# Altium PCB PCB3.PcbDoc
Units mil, origin at the board's own origin, x right, y up, seen from the top; angles counter-clockwise.
Board outline 3155 x 3150 mil, 2 copper layers (Top Layer, Bottom Layer); 10 components, 8 nets, 25 pads, 0 vias.
Unrouted connection lines stored in the file: 3.
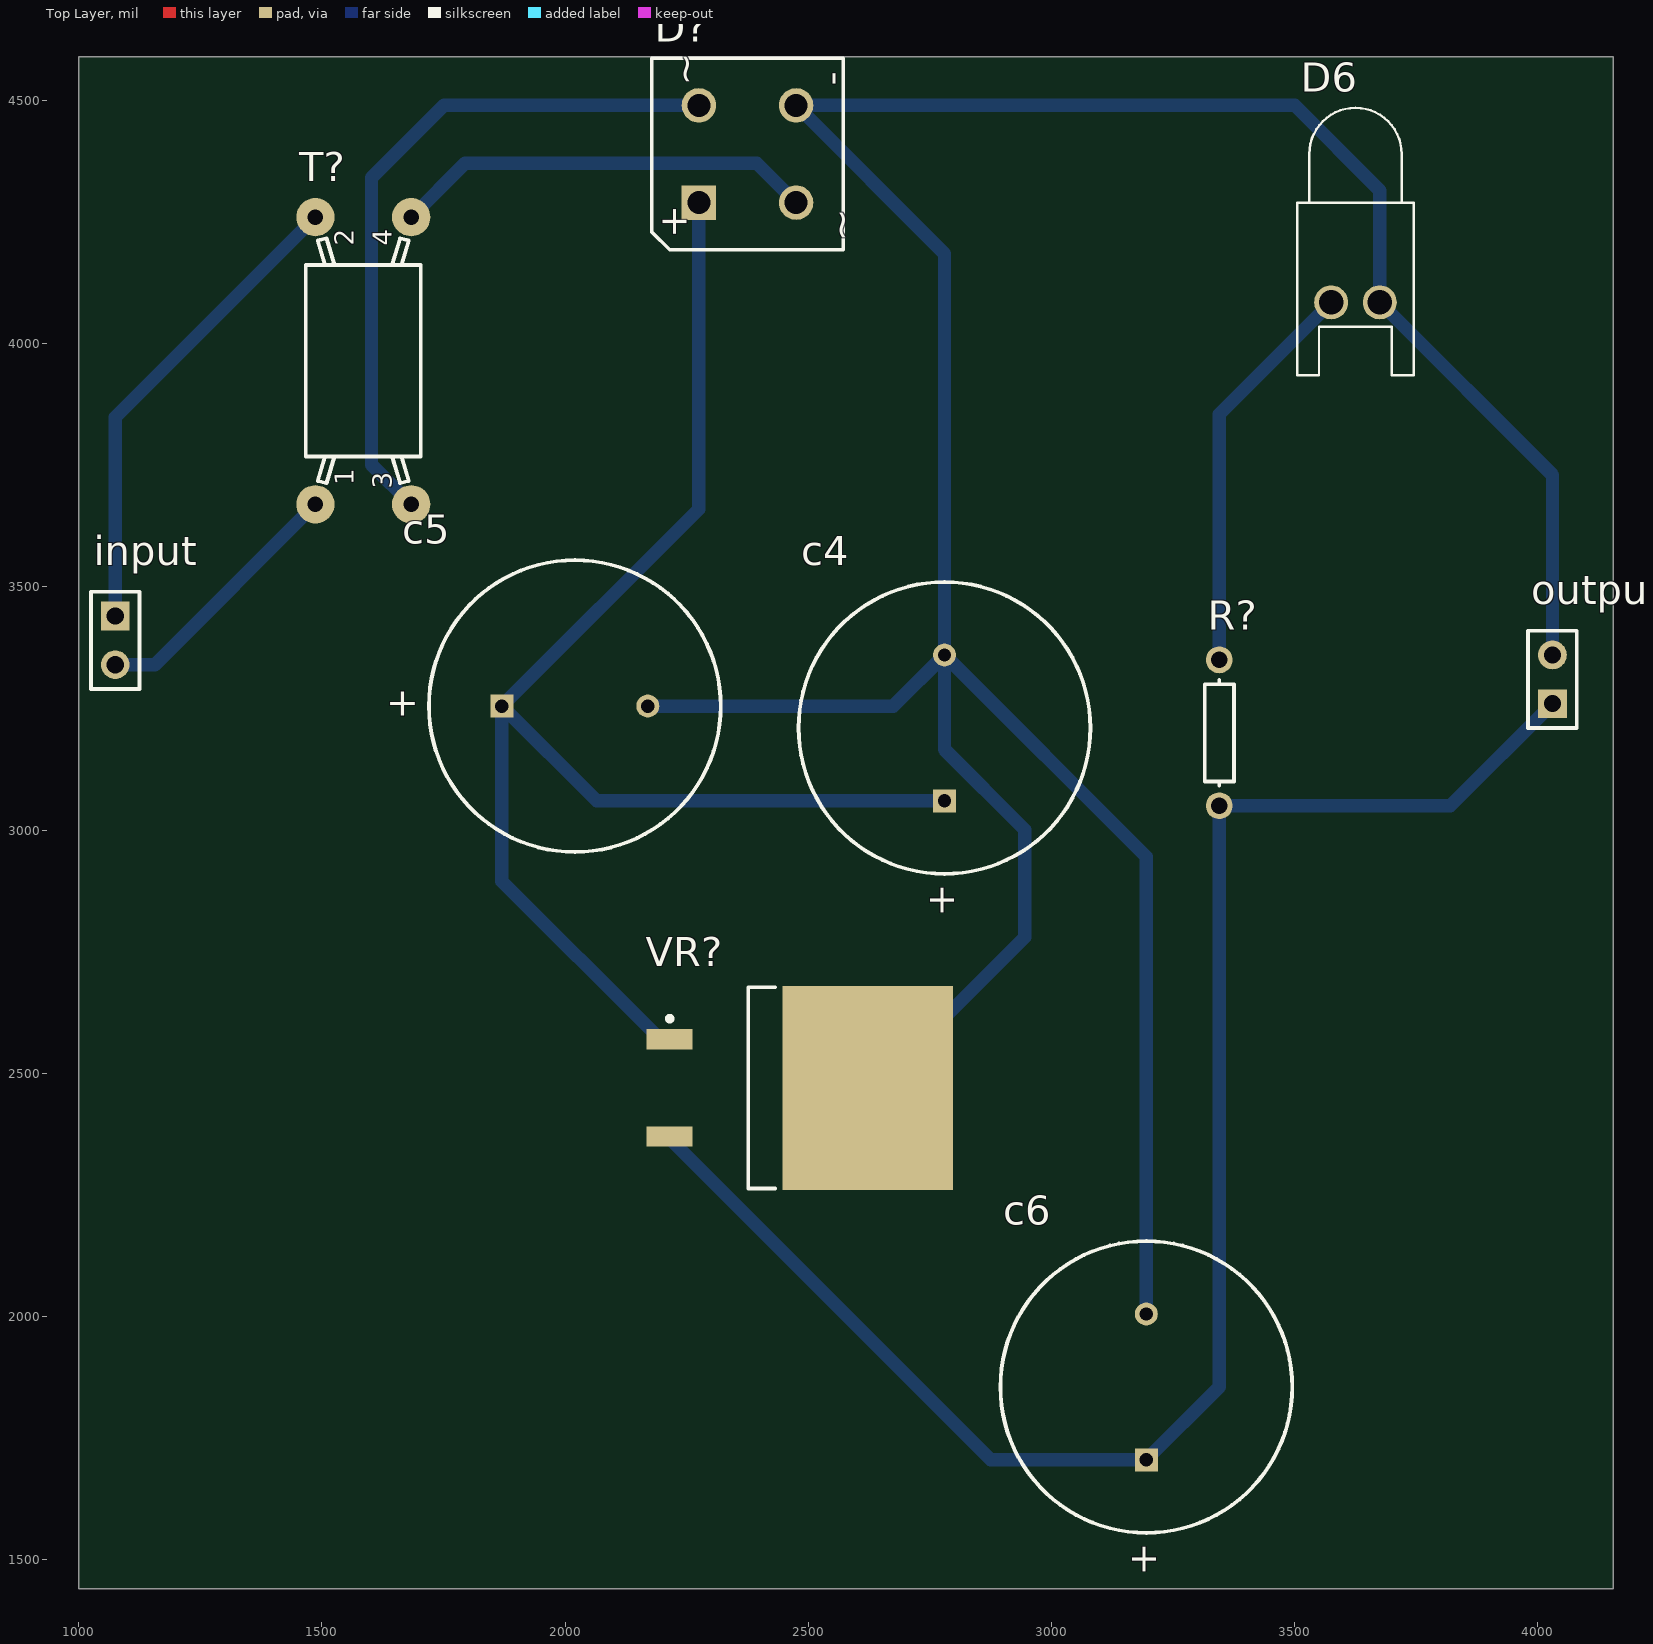
[diagram p0: Top Layer view]
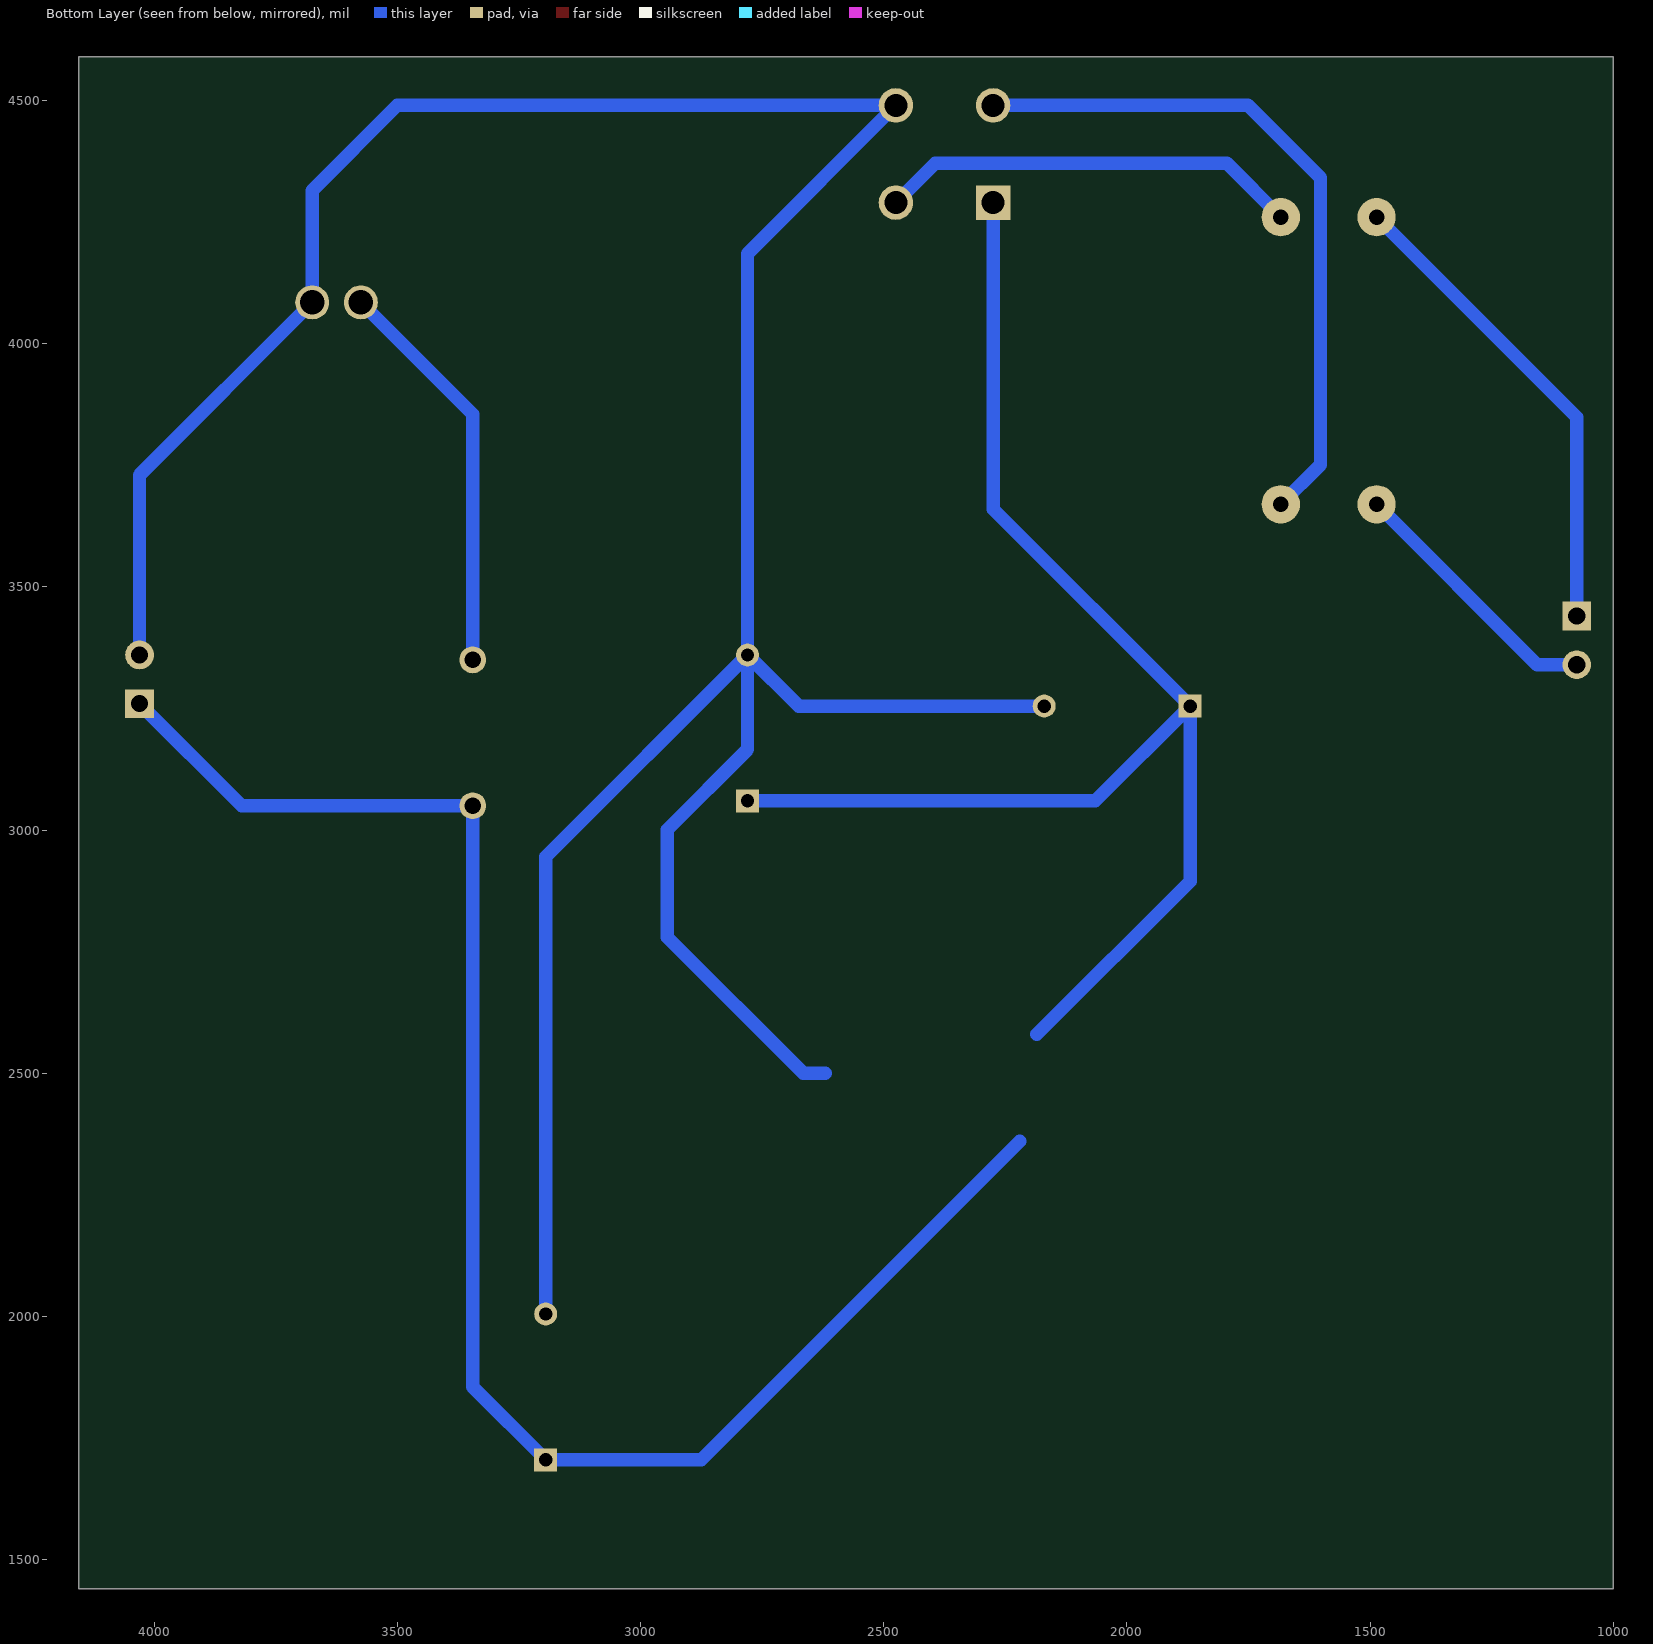
[diagram p1: Bottom Layer view, seen from below]

## Layer stack, top to bottom
Top Solder: solder mask 0.4, Solder Resist, Dk 3.5
Top Layer: signal copper 1.4
Dielectric 1: dielectric 12.6, FR-4, Dk 4.8
Bottom Layer: signal copper 1.4
Bottom Solder: solder mask 0.4, Solder Resist, Dk 3.5

## Board outline
1000,1440 4155,1440 4155,4590 1000,4590

## Design rules (kind name [scope] priority, off if disabled: settings)
Clearance [All] p1: gap=27.56 ignorepadtopadclearanceinfootprint=FALSE
PlaneConnect [All] p1: planeconnectstyle=Direct reliefexpansion=20 reliefentries=4 reliefconductorwidth=10 reliefairgap=10
PolygonConnect [All] p1: connectstyle=Relief reliefconductorwidth=10 reliefentries=4 polygonreliefangle="90 Angle" airgapwidth=10
RoutingLayers [All] p1: top layer_v5=FALSE bottom layer_v5=TRUE
RoutingVias [All] p1: holewidth=28 width=50 viastyle="Through Hole" minholewidth=28 minwidth=50 maxholewidth=28 maxwidth=50
SolderMaskExpansion [All] p1: expansion=4 istentingtop=FALSE
Width [All] p1: maxlimit=27.56 minlimit=27.56 preferedwidth=27.56
28 further rules are at their usual default settings.

## Components (designator, comment, footprint, x,y, rotation, side; value= is the part's Value field where it differs from the comment)
c4 "Cap Pol1" RB7.6-15 2780,3210 r270 top value=100pF
c5 "Cap Pol1" RB7.6-15 2020,3255 r180 top value=100pF
c6 "Cap Pol1" RB7.6-15 3195,1855 r270 top value=100pF
D6 "LED0" LED-0 3625,4085 r180 top
D? "Bridge1" D-38 2375,4390 r90 top
input "Header 2" HDR1X2 1075,3440 r270 top
output "Header 2" HDR1X2 4030,3260 r90 top
R? "Res1" AXIAL-0.3 3345,3200 r90 top value=1K
T? "Trans" TRANS 1585,3965 r90 top
VR? "Volt Reg" D2PAK_N 2482.72,2470 r0 top

## Footprints (in the part's own frame and the unit in brackets; to place one, negate y for a bottom-side part, rotate by r counter-clockwise, add the part's x,y. Pads: shape width x height; smd on the part's side, far side on the other; paste and mask are expansions set on the pad)
AXIAL-0.3 [mm] "Axial Device, Thru-Hole; 2 Leads; 0.3 in Pin Spacing"
  round 1.4 hole 0.85: 1(-3.81,0) 2(3.81,0)
  silkscreen extent -2.77,-0.76 2.77,0.76
D2PAK_N [mm] "D2-PAK, 4-Leads, Body 8.8x10.4mm, Pitch 2.54mm, Lead Span 15.1mm, IPC Medium Density"
  rect 2.4x1.05 smd: 1(-6.8,2.54) 3(-6.8,-2.54)
  rect 8.9x10.65 smd: 2(3.55,0)
  silkscreen extent -6.92,-5.25 -1.3,5.25, body extent -2.7,-5.28 6.3,5.28, height 4.69
D-38 [mm] "Bridge Rectifier; 4 Terminals; Body 9.4 x 9.4 mm (typ); Pitch 5.08 mm"
  rect 1.8x1.8 hole 1.2: 1(-2.54,2.54)
  round 1.8 hole 1.2: 2(-2.54,-2.54) 3(2.54,-2.54) 4(2.54,2.54)
  silkscreen extent -5,-5 5,5, body extent -5,-5 5,5, height 9.91
HDR1X2 [mm] "Connector; Header; 2 Position"
  rect 1.5x1.5 hole 0.9: 1(0,0)
  round 1.5 hole 0.9: 2(2.54,0)
  silkscreen extent -1.27,-1.27 3.81,1.27
LED-0 [mil] "LED; 2 Leads"
  round 70 hole 50: 1(50,0) 2(-50,0)
  silkscreen extent -120,-400 120,150
RB7.6-15 [mm] "Polarized Capacitor (Radial); 2 Leads"
  rect 1.2x1.2 hole 0.7: 1(3.81,0)
  round 1.2 hole 0.7: 2(-3.81,0)
  silkscreen extent -7.62,-7.62 7.62,7.62
TRANS [mm] "Transformer; 4 Leads"
  round 2 hole 0.8: 1(-7.5,2.5) 2(7.5,2.5) 3(-7.5,-2.5) 4(7.5,-2.5)
  silkscreen extent -6.4,-3 6.4,3

## Part data
c4 c5 c6: "Polarized Capacitor (Radial)", LatestRevisionDate=17-Jul-2002, LatestRevisionNote="Re-released for DXP Platform.", PackageDescription="Polarized Capacitor (Radial); 2 Leads", PackageReference=RB7.6-15, Published=8-Jun-2000, Publisher="Altium Limited"
D6: "Typical INFRARED GaAs LED", LatestRevisionDate=08-Jul-2005, LatestRevisionNote="Mech Layer 1 removed.", PackageDescription="LED; 2 Leads", PackageReference=LED-0, Published=8-Jun-2000, Publisher="Altium Limited"
D?: "Full Wave Diode Bridge", DatasheetVersion=E2732B, LatestRevisionDate=29-May-2009, LatestRevisionNote="Sch pins A & K swapped.", PackageDescription="Bridge Rectifier; 4 Terminals; Body 9.4 x 9.4 mm (typ); Pitch 5.08 mm", PackageReference=D-38, Published=8-Jun-2000, Publisher="Altium Limited"
input output: "Header, 2-Pin", LatestRevisionDate=17-Jul-2002, LatestRevisionNote="Re-released for DXP Platform.", Publisher="Altium Limited"
R?: "Resistor", LatestRevisionDate=17-Jul-2002, LatestRevisionNote="Re-released for DXP Platform.", PackageDescription="Axial Device, Thru-Hole; 2 Leads; 0.3 in Pin Spacing", PackageReference=AXIAL-0.3, Published=8-Jun-2000, Publisher="Altium Limited"
T?: "Transformer", LatestRevisionDate=08-Jul-2005, LatestRevisionNote="Mech Layer 1 removed.", PackageDescription="Transformer; 4 Leads", PackageReference=TRANS, Published=24-Mar-1999, Publisher="Altium Limited"
VR?: "Voltage Regulator", LatestRevisionDate=29-May-2009, LatestRevisionNote="IPC-7351 Footprint Added.", PackageDescription="3-Pin Transistor Outline Package 2.54 mm Pitch, 15.1 mm Lead Span", PackageReference=D2PAK, Published=24-Mar-1999, Publisher="Altium Limited"

## Nets (pads, with @x,y where several pads share a name; then routed paths per layer and width w, separated by ;. In a path a pad name is that pad's centre, name@x,y a point inside that pad or via, vN(x,y) a via of type N, cw(c..) or ccw(c..) an arc to the next point about the centre after c; other vN are vias at no path point)
GND: c4.2 c5.2 c6.2 D6.2 D?.3 output.2 VR?.2 | length 6900.6
  Bottom Layer w27.56: c5.2 2675,3255 c4.2 ; 2620,2500 2665,2500 2945,2780 2945,3000.71 2780,3165.71 c4.2 ; c6.2 3195,2945 c4.2 ; output.2 4030,3730 D6.2 3675,4315 3500,4490 D?.3 2780,4185 c4.2
Netc4_1: c4.1 c5.1 D?.1 VR?.1 | length 2999
  Bottom Layer w27.56: 2185,2580 1870,2895 c5.1 ; D?.1 2275,3660 c5.1 ; c4.1 2065,3060 c5.1
Netc6_1: c6.1 output.1 R?.1 VR?.3 | length 3425.4
  Bottom Layer w27.56: 2220,2360 2875,1705 c6.1 3345,1855 R?.1 3820,3050 output.1
NetD6_1: D6.1 R?.2 | length 830.3
  Bottom Layer w27.56: R?.2 3345,3855 D6.1
NetD?_2: D?.2 T?.4 | length 871
  Bottom Layer w27.56: T?.4 1794.15,4371 2394,4371 D?.2
NetD?_4: D?.4 T?.3 | length 1439.7
  Bottom Layer w27.56: T?.3 1602,3751.15 1602,4341 1751,4490 D?.4
Netinput_1: input.1 T?.2 | length 990.8
  Bottom Layer w27.56: input.1 1075,3848.7 T?.2
Netinput_2: input.2 T?.1 | length 548.2
  Bottom Layer w27.56: input.2 1156.85,3340 T?.1

## Dimensions
1000,4600 to 950,1450 on Top Layer
1000,4590 to 4150,4605 on Top Layer

## Text inside footprints (layer, text, board x,y; h text height)
c4: Top Overlay "+" at 2750.99,2889.85 h59.06 r270
c5: Top Overlay "+" at 1699.85,3284.01 h59.06 r180
c6: Top Overlay "+" at 3165.99,1534.85 h59.06 r270
D?: Top Overlay "+" at 2250.43,4216.38 h59.06 r90; Top Overlay "-" at 2575,4530 h59.05 r90; Top Overlay "~" at 2595,4210 h59.05 r90; Top Overlay "~" at 2275,4530 h59.05 r90
T?: Top Overlay "1" at 1565.32,3709.09 h39.37 r90; Top Overlay "2" at 1565.32,4201.22 h39.37 r90; Top Overlay "3" at 1644.06,3702.2 h39.37 r90; Top Overlay "4" at 1644.06,4201.22 h39.37 r90